# Altium PCB PCB2.PcbDoc
Units mm, origin at the board's own origin, x right, y up, seen from the top; angles counter-clockwise.
Board outline 82.17 x 127.5 mm, 2 copper layers (Top Layer, Bottom Layer); 25 components, 35 nets, 110 pads, 0 vias.
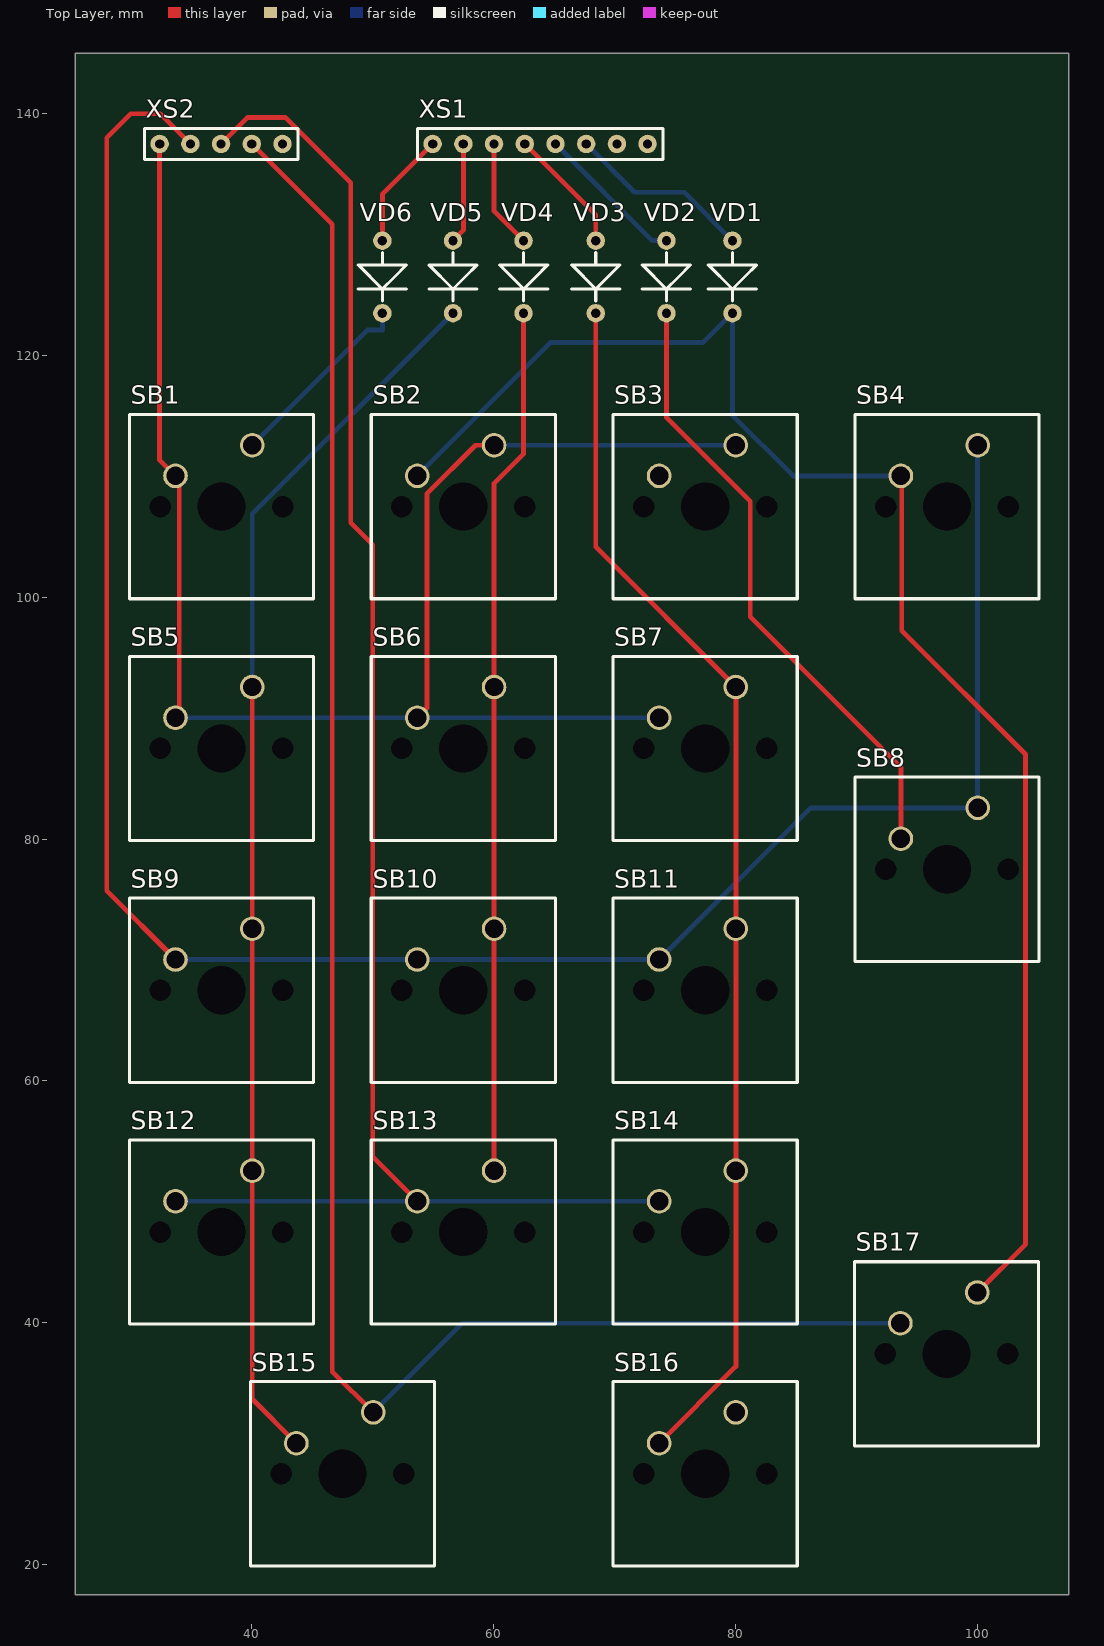
[diagram p0: Top Layer view]
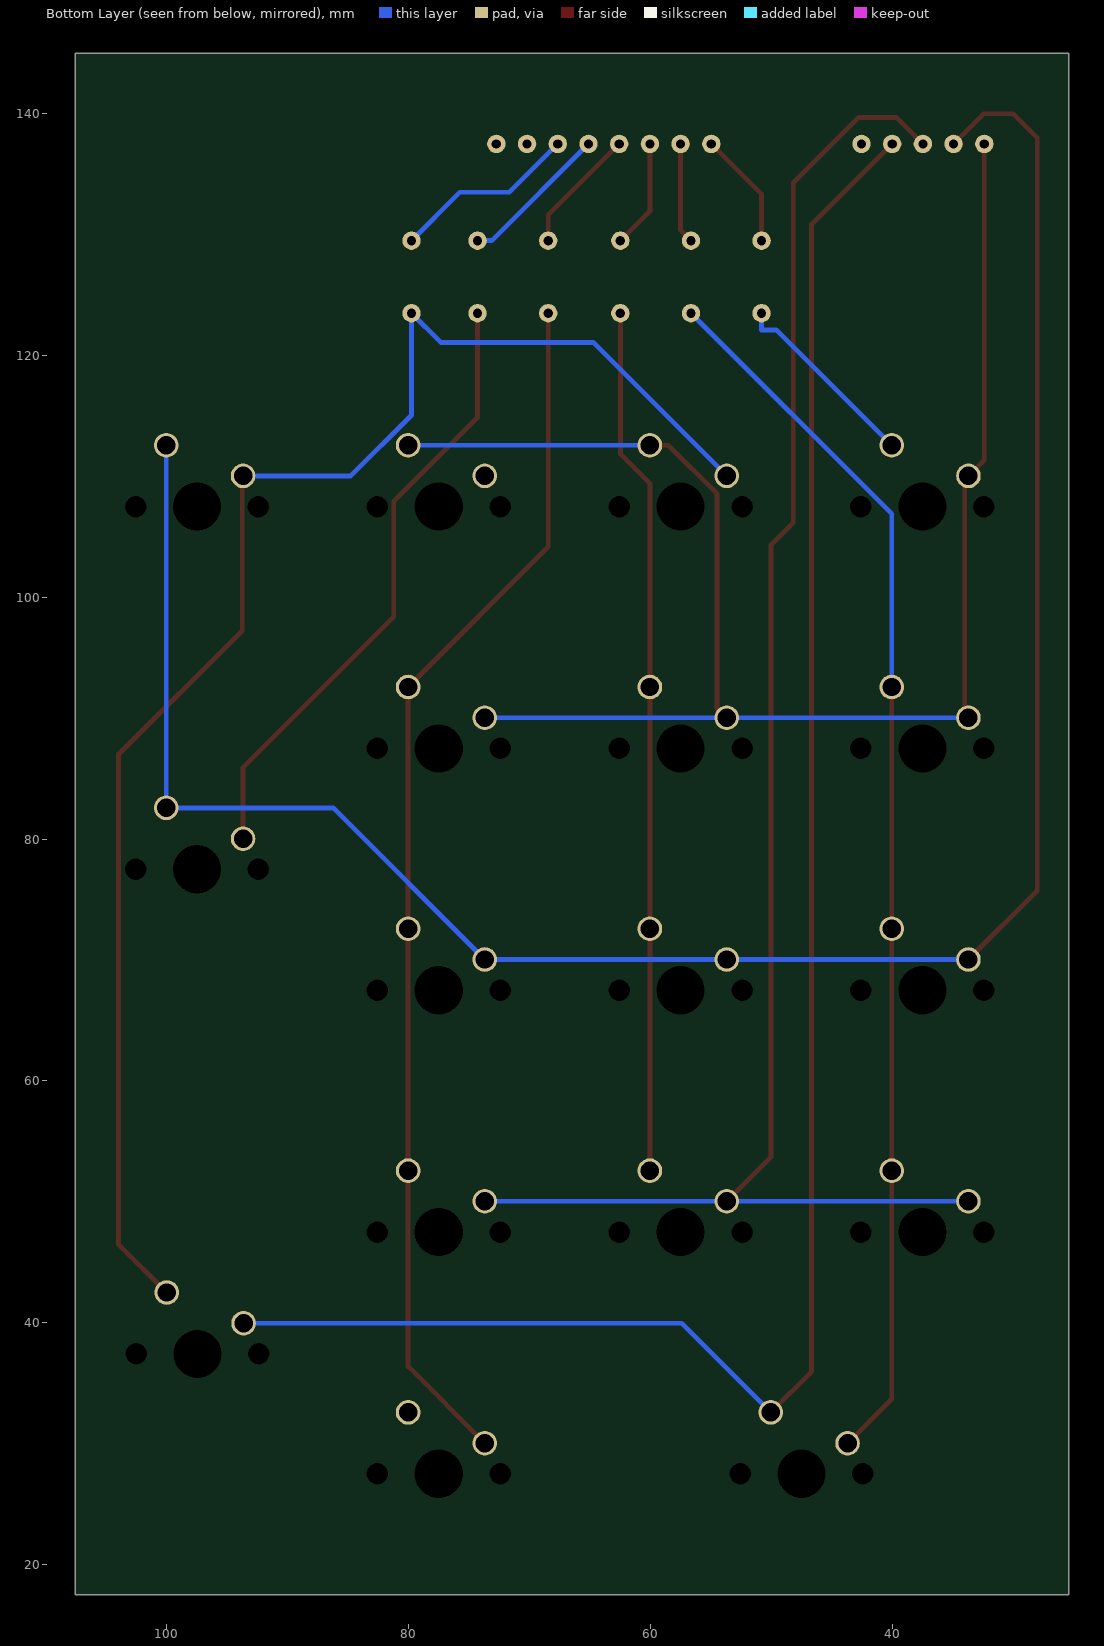
[diagram p1: Bottom Layer view, seen from below]

## Layer stack, top to bottom
Top Solder: solder mask 0.0102, Solder Resist, Dk 3.5
Top Layer: signal copper 0.0356
Dielectric 1: dielectric 0.32, FR-4, Dk 4.8
Bottom Layer: signal copper 0.0356
Bottom Solder: solder mask 0.0102, Solder Resist, Dk 3.5

## Board outline
25.4,17.5 107.569,17.5 107.569,145 25.4,145

## Design rules (kind name [scope] priority, off if disabled: settings)
Clearance [All] p1: gap=0.254 ignorepadtopadclearanceinfootprint=FALSE except(0: Arc-Hole Track-Hole SMDPad-Hole THPad-Hole Via-Hole Fill-Hole Poly-Hole Region-Hole Text-Hole)
PolygonConnect [All] p1: connectstyle=Relief reliefconductorwidth=0.254 reliefentries=4 polygonreliefangle="90 Angle" airgapwidth=0.254
RoutingVias [All] p1: holewidth=0.711 width=1.27 viastyle="Through Hole" minholewidth=0.711 minwidth=1.27 maxholewidth=0.711 maxwidth=1.27
SolderMaskExpansion [All] p1: expansion=0.102
Width [All] p1: maxlimit=0.4 minlimit=0.4 preferedwidth=0.4
30 further rules are at their usual default settings.

## Components (designator, comment, footprint, x,y, rotation, side; value= is the part's Value field where it differs from the comment)
SB1 "\"on/off\"" GateronMXswitch 37.5,107.5 r0 top
SB2 "\"/\"" GateronMXswitch 57.5,107.5 r0 top
SB3 "\"*\"" GateronMXswitch 77.5,107.5 r0 top
SB4 "\"-\"" GateronMXswitch 97.5,107.5 r0 top
SB5 "\"7\"" GateronMXswitch 37.5,87.5 r0 top
SB6 "\"8\"" GateronMXswitch 57.5,87.5 r0 top
SB7 "\"9\"" GateronMXswitch 77.5,87.5 r0 top
SB8 "\"+\"" GateronMXswitch 97.5,77.5 r0 top
SB9 "\"4\"" GateronMXswitch 37.5,67.5 r0 top
SB10 "\"5\"" GateronMXswitch 57.5,67.5 r0 top
SB11 "\"6\"" GateronMXswitch 77.5,67.5 r0 top
SB12 "\"1\"" GateronMXswitch 37.5,47.5 r0 top
SB13 "\"2\"" GateronMXswitch 57.5,47.5 r0 top
SB14 "\"3\"" GateronMXswitch 77.5,47.5 r0 top
SB15 "\"0\"" GateronMXswitch 47.5,27.5 r0 top
SB16 "\".\"" GateronMXswitch 77.5,27.5 r0 top
SB17 "\"=\"" GateronMXswitch 97.46,37.42 r0 top
VD1 "Diode" DIODE 79.756,129.5 r180 top
VD2 "Diode" DIODE 74.295,129.5 r180 top
VD3 "Diode" DIODE 68.453,129.5 r180 top
VD4 "Diode" DIODE 62.484,129.5 r180 top
VD5 "Diode" DIODE 56.642,129.5 r180 top
VD6 "Diode" DIODE 50.8,129.5 r180 top
XS1 "PORT8" XS8HOLES 72.74,137.5 r90 top
XS2 "PORT6" XS5HOLES 32.38,137.5 r270 top

## Footprints (in the part's own frame and the unit in brackets; to place one, negate y for a bottom-side part, rotate by r counter-clockwise, add the part's x,y. Pads: shape width x height; smd on the part's side, far side on the other; paste and mask are expansions set on the pad)
DIODE [mil]
  round 60 hole 30: 1(0,0) 2(0,236.22)
  silkscreen extent -79,39 79,197
GateronMXswitch [mil]
  round 60 hole 70: 0(-200,0) 0(200,0)
  round 60 hole 157: 0(0,0)
  round 80 hole 60: 1(-150,100) 2(100,200)
  silkscreen extent -300,-300 300,300
XS5HOLES [mil]
  round 60 hole 30: 1(0,0) 2(0,100) 3(0,200) 4(0,300) 5(0,400)
  silkscreen extent -50,-50 50,450
XS8HOLES [mil]
  round 60 hole 30: 1(0,0) 2(0,100) 3(0,200) 4(0,300) 5(0,400) 6(0,500) 7(0,600) 8(0,700)
  silkscreen extent -50,-50 50,750

## Part data
SB1 SB2 SB3 SB4 SB5 SB6 SB7 SB8 SB9 SB10 SB11 SB12 SB13 SB14 SB15 SB16 SB17: library part BT-01x-01p, Published=17.04.2014, Publisher="Andrew Danich", Type=Переключатель
VD1 VD2 VD3 VD4 VD5 VD6: Published=18.05.2010, Publisher="Andrew Danich", Type=Диод

## Nets (pads, with @x,y where several pads share a name; then routed paths per layer and width w, separated by ;. In a path a pad name is that pad's centre, name@x,y a point inside that pad or via, vN(x,y) a via of type N, cw(c..) or ccw(c..) an arc to the next point about the centre after c; other vN are vias at no path point)
1: 
2: 
3: VD1.1 XS1.3 | length 15.7
  Top Layer w0.254: XS1.3 XS1.3@67.911,137.5
  Bottom Layer w0.4: XS1.3 71.658,133.502 75.754,133.502 VD1.1
4: VD2.1 XS1.4 | length 12.5
  Bottom Layer w0.4: XS1.4 73.12,129.5 VD2.1
5: VD3.1 XS1.5 | length 10.4
  Top Layer w0.4: XS1.5 68.453,131.627 VD3.1
6: VD4.1 XS1.6 | length 9
  Top Layer w0.4: XS1.6 60.04,131.944 VD4.1
7: VD5.1 XS1.7 | length 8.4
  Top Layer w0.4: VD5.1 57.5,130.358 XS1.7
8: VD6.1 XS1.8 | length 9.7
  Top Layer w0.4: VD6.1 50.8,133.34 XS1.8
9: 
10: 
11: 
12: 
13: 
NetGB1_1: 
NetGB1_2: 
NetHB1_9: 
NetHB1_10: 
NetHB1_11: 
NetHB1_12: 
NetHB1_13: 
NetHB1_14: 
NetHB1_15: 
NetR1_1: 
NetR3_1: 
NetR5_2: 
NetSB1_1: SB1.1 SB2.2 SB3.2 SB5.1 SB6.1 SB7.1 XS2.1 | length 134.5
  Top Layer w0.4: XS2.1 32.38,111.35 SB1.1 33.96,110.04 34,110 34,90.35 SB5.1 ; SB6.1 54.483,90.833 54.483,108.56 58.503,112.58 SB2.2
  Bottom Layer w0.4: SB5.1 SB6.1 SB7.1 ; SB2.2 SB3.2
NetSB1_2: SB1.2 VD6.2 | length 16.1
  Bottom Layer w0.4: SB1.2 49.583,122.123 50.8,122.123 VD6.2
NetSB2_1: SB2.1 SB4.1 SB17.2 VD1.2 | length 129.6
  Top Layer w0.4: SB4.1 93.763,109.967 93.763,97.237 104,87 104,46.5 SB17.2
  Bottom Layer w0.4: SB2.1 64.732,121.082 77.338,121.082 VD1.2 79.756,115.062 84.778,110.04 SB4.1
NetSB4_2: SB4.2 SB8.2 SB9.1 SB10.1 SB11.1 XS2.2 | length 180.6
  Top Layer w0.4: SB9.1 28,75.73 28,138 30,140 32.42,140 XS2.2
  Bottom Layer w0.4: SB9.1 SB10.1 SB11.1 86.23,82.58 SB8.2 SB4.2
NetSB5_2: SB5.2 SB9.2 SB12.2 SB15.1 VD5.2 | length 101.8
  Top Layer w0.4: SB5.2 SB9.2 SB12.2 40.04,33.69 SB15.1
  Bottom Layer w0.4: SB5.2 40.04,106.898 VD5.2
NetSB6_2: SB6.2 SB10.2 SB13.2 VD4.2 | length 71.9
  Top Layer w0.4: SB13.2 SB10.2 SB6.2 60.04,109.418 62.484,111.862 VD4.2
NetSB7_2: SB7.2 SB11.2 SB14.2 SB16.1 VD3.2 | length 100.9
  Top Layer w0.4: VD3.2 68.453,104.167 SB7.2 SB11.2 SB14.2 80.04,36.39 SB16.1
NetSB8_1: SB8.1 VD2.2 | length 51.5
  Top Layer w0.4: VD2.2 74.295,114.884 81.229,107.95 81.229,98.4 93.69,85.939 SB8.1
NetSB12_1: SB12.1 SB13.1 SB14.1 XS2.3 | length 140.4
  Top Layer w0.4: XS2.3 39.66,139.7 42.759,139.7 48.184,134.275 48.184,106.172 50.013,104.343 50.013,53.717 SB13.1
  Bottom Layer w0.4: SB12.1 SB13.1 SB14.1
NetSB15_2: SB15.2 SB17.1 XS2.4 | length 155.7
  Top Layer w0.4: XS2.4 46.66,130.84 46.66,35.96 SB15.2
  Bottom Layer w0.4: SB15.2 57.42,39.96 SB17.1
pads on no net: SB1.0 SB2.0 SB3.0 SB3.1 SB4.0 SB5.0 SB6.0 SB7.0 SB8.0 SB9.0 SB10.0 SB11.0 SB12.0 SB13.0 SB14.0 SB15.0 SB16.0 SB16.2 SB17.0 XS1.1 XS1.2 XS2.5